# Altium PCB biv2-LRTP_1a.PcbDoc
Units mm, origin at the board's own origin, x right, y up, seen from the top; angles counter-clockwise.
Board outline 43 x 43 mm, 2 copper layers (Top Layer, Bottom Layer), stack 1.535 mm thick; 8 components, 8 nets, 38 pads, 0 vias.
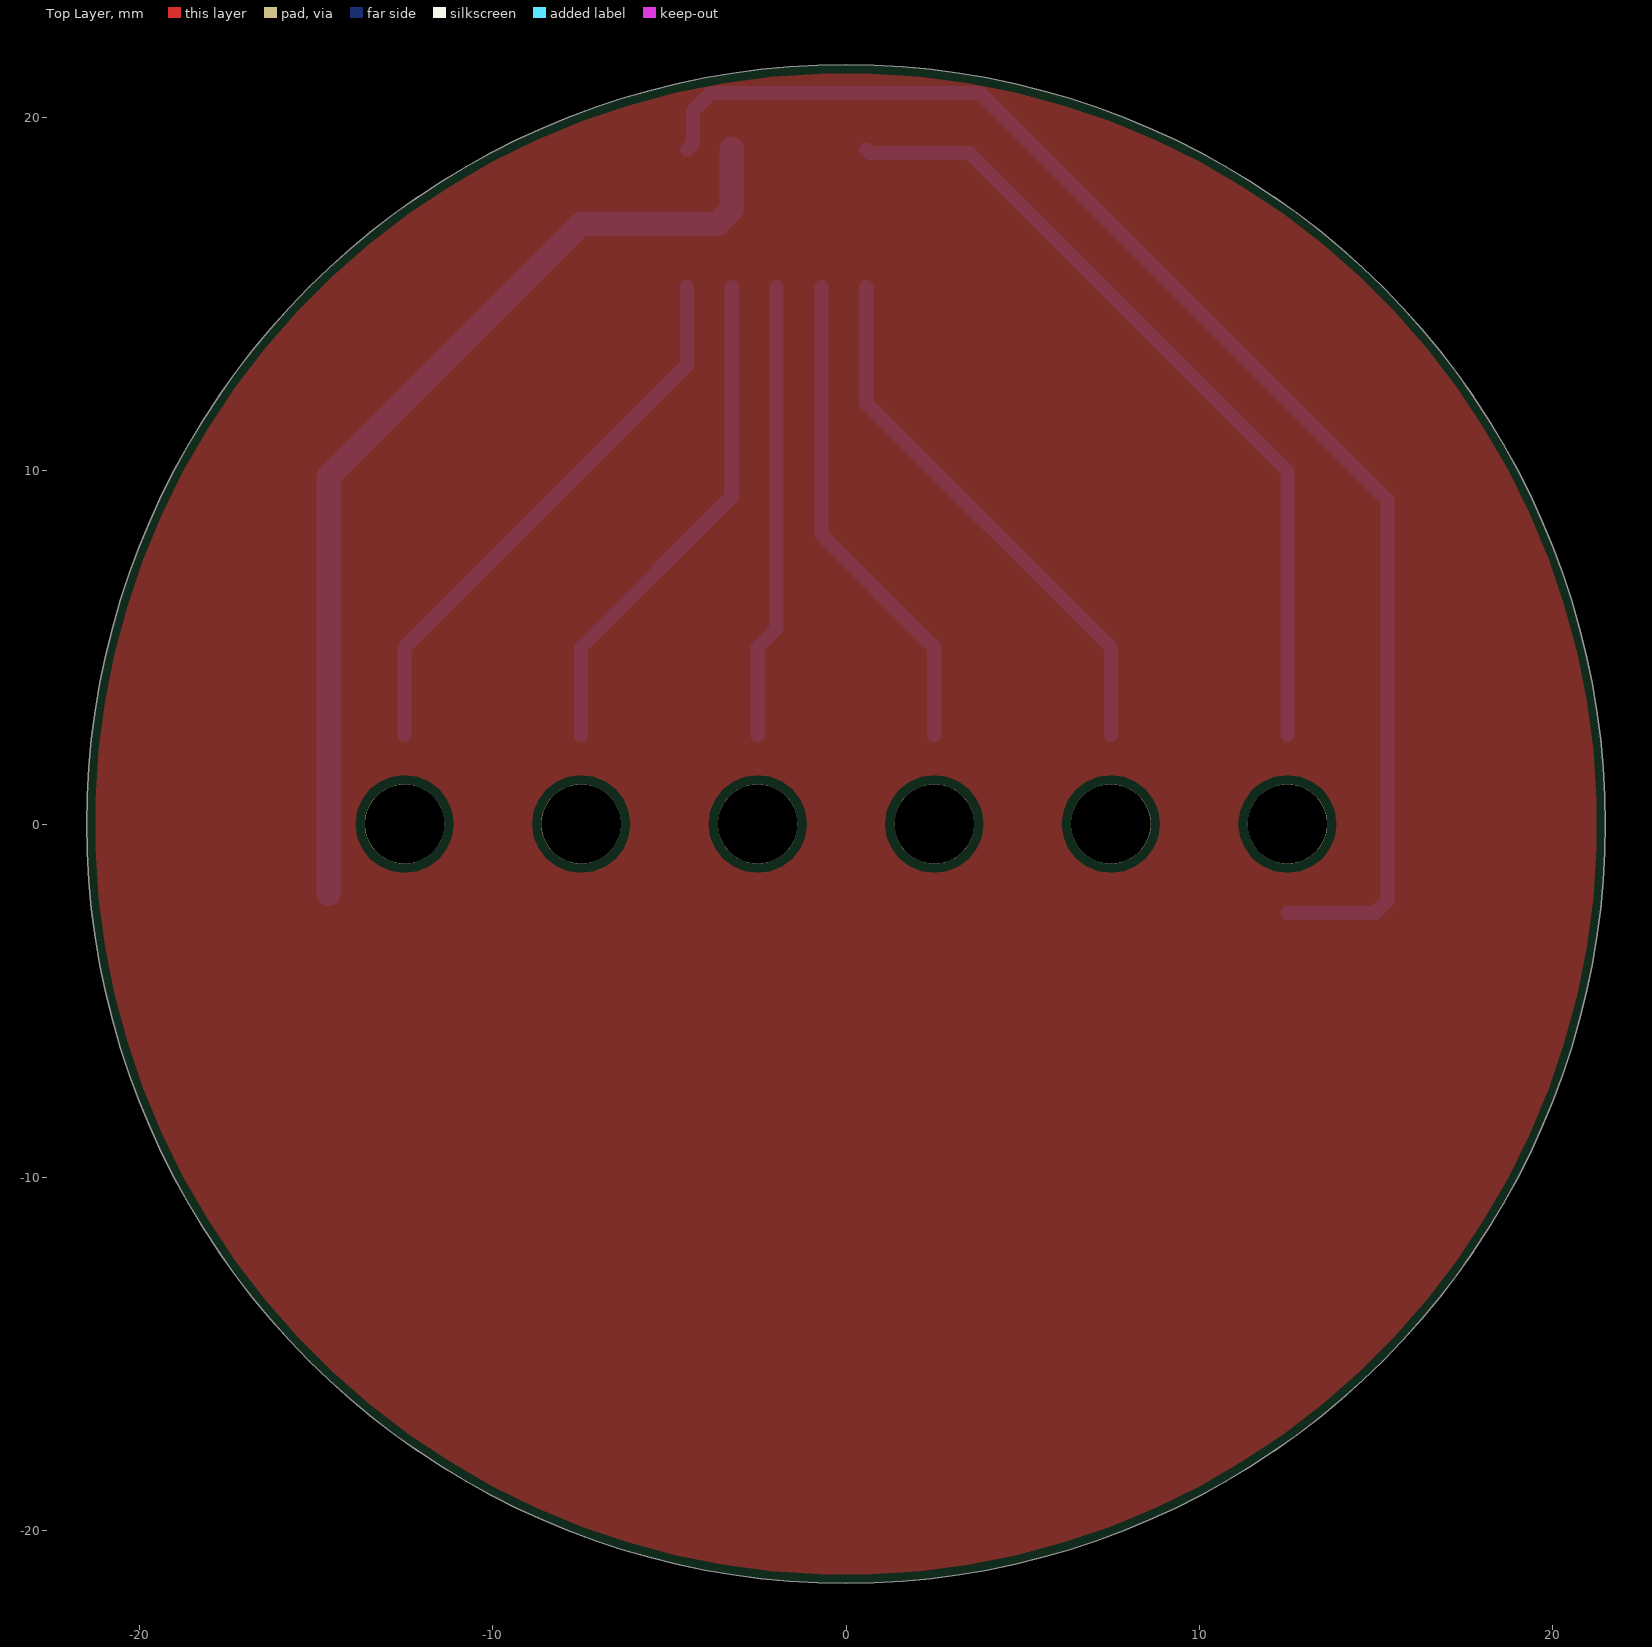
[diagram p0: Top Layer view]
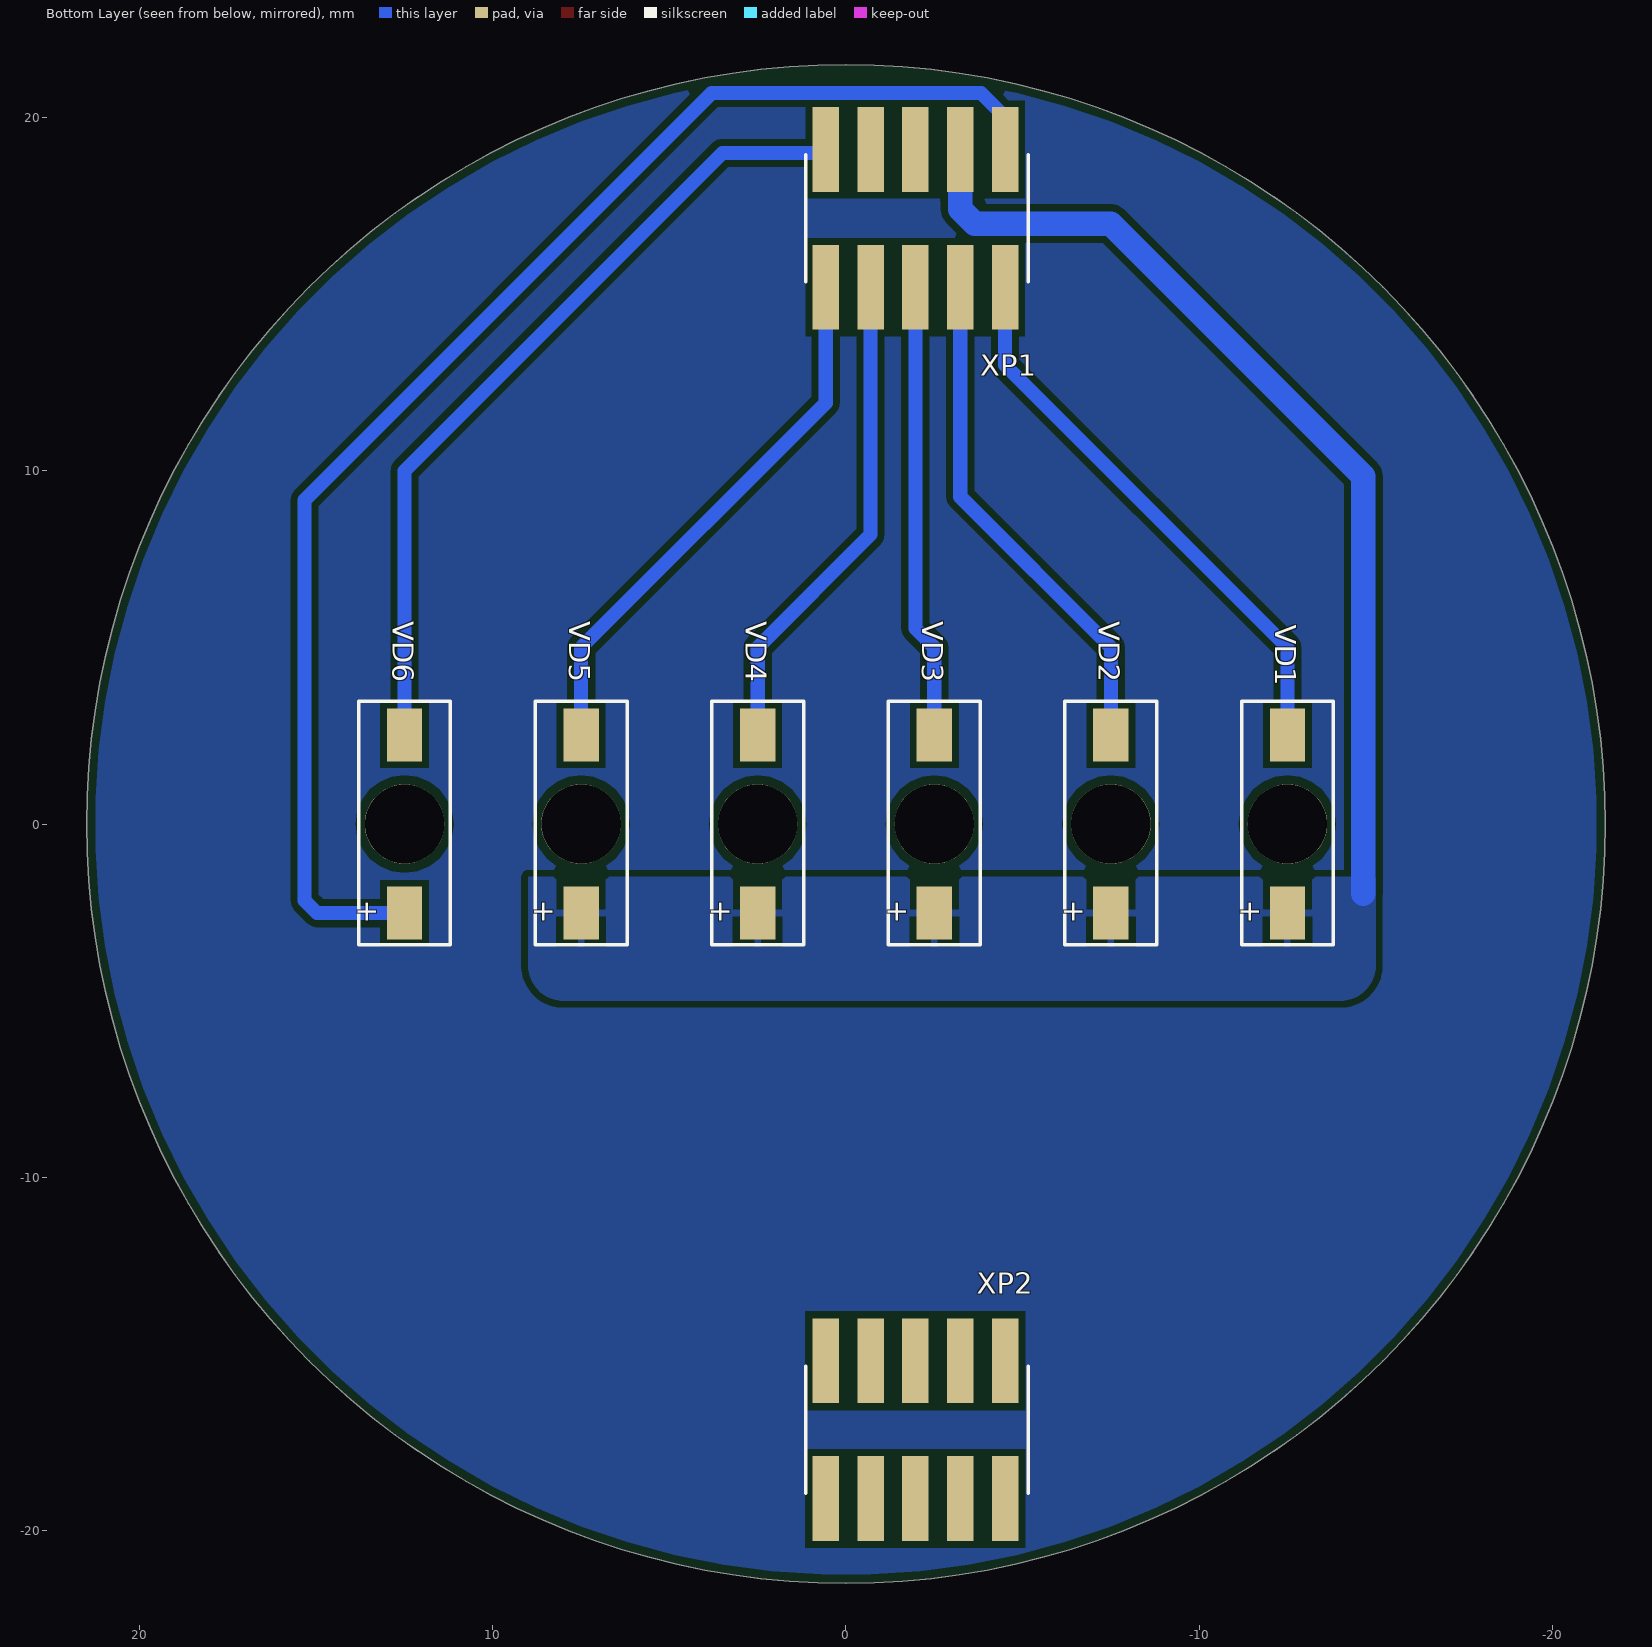
[diagram p1: Bottom Layer view, seen from below]

## Layer stack, top to bottom
Top Solder: solder mask 0.0254, SM-001, Dk 4
Top Layer: signal copper 0.018
Dielectric 1: core 1.4986, Core-043, Dk 4.3
Bottom Layer: signal copper 0.018
Bottom Solder: solder mask 0.0254, SM-001, Dk 4

## Board outline
-21.5,0 ccw(c0,0) 0,-21.5 ccw(c0,0) 21.5,0 ccw(c0,0) 0,21.5 ccw(c0,0)

## Design rules (kind name [scope] priority, off if disabled: settings)
AcuteAngle [All] p1: minimum=3.50000000000000E+0001 checktracksonly=FALSE
BoardOutlineClearance "BoardOutlineClearance 1" [All] p1: gap=0.25 ignorepadtopadclearanceinfootprint=FALSE except(0: Arc-SplitContinuation Track-SplitContinuation SMDPad-SplitContinuation THPad-SplitContinuation Via-SplitContinuation Fill-SplitContinuation Poly-SplitContinuation Region-SplitContinuation Text-SplitContinuation) // Milling
BoardOutlineClearance "BoardOutlineClearance 2" [All] p2: gap=0.4 ignorepadtopadclearanceinfootprint=FALSE except(0: Arc-SplitContinuation Track-SplitContinuation SMDPad-SplitContinuation THPad-SplitContinuation Via-SplitContinuation Fill-SplitContinuation Poly-SplitContinuation Region-SplitContinuation Text-SplitContinuation) // V-Cut
Clearance "Clearance-1 1 Oz" [All] p1: gap=0.2 ignorepadtopadclearanceinfootprint=TRUE except(0.25: Arc-Hole Track-Hole SMDPad-Hole THPad-Hole Via-Hole Fill-Hole Poly-Hole Region-Hole Text-Hole) // Standart
Clearance "Clearance-1 1/2 Oz" [All] p2: gap=0.125 ignorepadtopadclearanceinfootprint=FALSE except(0.2: Arc-Fill Arc-Poly Track-Fill Track-Poly SMDPad-SMDPad SMDPad-Fill SMDPad-Poly THPad-Fill THPad-Poly Via-Fill Via-Poly Fill-Fill Fill-Poly Poly-Poly Poly-Region Poly-Text; 0.25: Arc-Hole Track-Hole SMDPad-Hole THPad-Hole Via-Hole Fill-Hole Poly-Hole Region-Hole Text-Hole) // Standart
DiffPairsRouting "DiffPairsRouting 1 Oz" [All] p1: maxlimit=0.254 minlimit=0.2 mostfreqgap=0.254 toplayer_minwidth=0.2 toplayer_maxwidth=0.381 toplayer_prefwidth=0.381 bottomlayer_minwidth=0.2 bottomlayer_maxwidth=0.381 bottomlayer_prefwidth=0.381 maxuncoupledlength=12.7
DiffPairsRouting "DiffPairsRouting 1/2 Oz" [All] p2: maxlimit=0.254 minlimit=0.1 mostfreqgap=0.254 toplayer_minwidth=0.1 toplayer_maxwidth=0.381 toplayer_prefwidth=0.381 bottomlayer_minwidth=0.1 bottomlayer_maxwidth=0.381 bottomlayer_prefwidth=0.381 maxuncoupledlength=12.7
HoleSize "Minimum HoleSize" [IsPad] p1: absolutevalues=TRUE maxlimit=5.9 minlimit=0.6 maxpercent=80.000 minpercent=20.000
HoleSize "Minimum HoleSize VIA 1" [IsVia] p2: absolutevalues=TRUE maxlimit=5.9 minlimit=0.3 maxpercent=80.000 minpercent=20.000 // Standart
HoleToHoleClearance Hole2HoleClearance [All] p1: gap=0.25 allowstackedmicrovias=FALSE
MinimumAnnularRing "Minimum AR VIA Standart" [IsVia] p1: minimumring=0.15
MinimumAnnularRing "Minimum AR PAD Standart" [IsPAD] p2: minimumring=0.2
MinimumAnnularRing "Minimum AR VIA Advance" [IsVia] p3: minimumring=0.1
MinimumAnnularRing "Minimum AR PAD Advance" [IsPAD] p4: minimumring=0.15
MinimumSolderMaskSliver "SolderMask Bridge Standart" [All] p1: minsoldermaskwidth=0.15 // All Masks
MinimumSolderMaskSliver "SolderMask Bridge Advance" [All] p2: minsoldermaskwidth=0.1 // Mask LDI
PlaneClearance "PlaneClearance 1 Oz" [All] p1: clearance=0.2
PlaneClearance "PlaneClearance-1 1/2 Oz" [All] p2: clearance=0.2 // Standart
PlaneConnect "TermalConnect-1 1 Oz" [All] p1: planeconnectstyle=Relief reliefexpansion=0.2 reliefentries=4 reliefconductorwidth=0.2 reliefairgap=0.2 // Standart
PolygonConnect "PolygonConnect-1 1 Oz" [All] p1: thpad.connectstyle=Relief thpad.reliefconductorwidth=0.2 thpad.reliefentries=4 thpad.polygonreliefangle="90 Angle" thpad.airgapwidth=0.2 smdpad.connectstyle=Relief smdpad.reliefconductorwidth=0.2 smdpad.reliefentries=4 smdpad.polygonreliefangle="90 Angle" smdpad.airgapwidth=0.2 via.connectstyle=Direct via.reliefconductorwidth=0.254 via.reliefentries=4 via.polygonreliefangle="90 Angle" via.airgapwidth=0.254 // Standart
PolygonConnect "PolygonConnect-1 1/2 Oz" [All] p2: thpad.connectstyle=Relief thpad.reliefconductorwidth=0.15 thpad.reliefentries=4 thpad.polygonreliefangle="90 Angle" thpad.airgapwidth=0.2 smdpad.connectstyle=Relief smdpad.reliefconductorwidth=0.2 smdpad.reliefentries=4 smdpad.polygonreliefangle="90 Angle" smdpad.airgapwidth=0.2 via.connectstyle=Direct via.reliefconductorwidth=0.254 via.reliefentries=4 via.polygonreliefangle="90 Angle" via.airgapwidth=0.254 // Standart
RoutingCorners [All] p1 off: cornerstyle=45-Degree minsetback=2.54 maxsetback=2.54
RoutingVias [All] p1: holewidth=0.3 width=0.6 viastyle="Through Hole" minholewidth=0.2 minwidth=0.4 maxholewidth=5.9 maxwidth=6.4
ShortCircuit [All] p1: allowed=TRUE
SilkToSilkClearance Silk2SilkClearance [All] p1 off: silktosilkclearance=0.15
SilkToSolderMaskClearance Silk2SolderMaskClearance [IsPad] p1 off: minsilkscreentomaskgap=0.15 clearancetoexposedcopper=TRUE
SolderMaskExpansion SolderMaskExpansion-1 [All] p1: expansion=0.05 istentingtop=FALSE // Standart
SolderMaskExpansion "SolderMaskExpansion LDI" [All] p2: expansion=0.025 istentingtop=FALSE // Advance
UnRoutedNet [All] p1: checkbadconnections=TRUE
Width "Width 1 Oz" [All] p1: maxlimit=10 minlimit=0.15 preferedwidth=0.2 checkconnectedcopper=TRUE
Width "Width 1/2 Oz" [All] p2: maxlimit=10 minlimit=0.1 preferedwidth=0.125 checkconnectedcopper=TRUE
19 further rules are at their usual default settings.

## Components (designator, comment, footprint, x,y, rotation, side; value= is the part's Value field where it differs from the comment)
VD1 "KM2520SURCK09" KM2520SURCK09 -12.5,-2.525 r90 bottom
VD2 "KM2520SURCK09" KM2520SURCK09 -7.5,-2.525 r90 bottom
VD3 "KM2520SURCK09" KM2520SURCK09 -2.5,-2.525 r90 bottom
VD4 "KM2520SURCK09" KM2520SURCK09 2.5,-2.525 r90 bottom
VD5 "KM2520SURCK09" KM2520SURCK09 7.5,-2.525 r90 bottom
VD6 "KM2520SURCK09" KM2520SURCK09 12.5,-2.525 r90 bottom
XP1 "PLLD-10S" "CON: PLLD-10S" -1.965,17.15 r180 bottom locked
XP2 "PLLD-10S" "CON: PLLD-10S" -1.965,-17.15 r180 bottom locked

## Footprints (in the part's own frame and the unit in brackets; to place one, negate y for a bottom-side part, rotate by r counter-clockwise, add the part's x,y. Pads: shape width x height; smd on the part's side, far side on the other; paste and mask are expansions set on the pad)
"CON: PLLD-10S" [mm]
  rect 0.75x2.4 smd: 1(-2.54,-1.95) 2(-2.54,1.95) 3(-1.27,-1.95) 4(-1.27,1.95) 5(0,-1.95) 6(0,1.95) 7(1.27,-1.95) 8(1.27,1.95) 9(2.54,-1.95) 10(2.54,1.95)
  silkscreen extent -3.1,-1.8 3.2,1.8, body extent -3.13,-2.74 3.22,2.66, height 4.46
KM2520SURCK09 [mm] "SM LED Body 1.6x0.8mm; 2 Flat Leads"
  round 2.25 hole 2.25 unplated: 0(2.525,0)
  rect 1.5x1 smd: 1(0,0) 2(5.05,0)
  silkscreen extent -0.9,-1.3 6,1.3, body extent 1.1,-0.9 3.5,1, height 1.5

## Part data
VD1 VD2 VD3 VD4 VD5 VD6: "LED"
XP1 XP2: "Step 1.27"

## Nets (pads, with @x,y where several pads share a name; then routed paths per layer and width w, separated by ;. In a path a pad name is that pad's centre, name@x,y a point inside that pad or via, vN(x,y) a via of type N, cw(c..) or ccw(c..) an arc to the next point about the centre after c; other vN are vias at no path point)
LED1: VD6.1 XP1.10 | length 40.1
  Bottom Layer w0.4: XP1.10 -4.33,19.275 -4.33,20.194 -3.824,20.7 3.8,20.7 15.334,9.166 15.334,-2.166 14.975,-2.525 VD6.1
LED1_GND: VD6.2 XP1.2 | length 23.2
  Bottom Layer w0.4: XP1.2 0.675,19 3.5,19 12.5,10 VD6.2
LED2: VD1.2 XP1.9 | length 16
  Bottom Layer w0.4: VD1.2 -12.5,5 -4.505,12.995 XP1.9
LED3: VD2.2 XP1.7 | length 14.4
  Bottom Layer w0.4: VD2.2 -7.5,5 -3.235,9.265 XP1.7
LED4: VD3.2 XP1.5 | length 12.9
  Bottom Layer w0.4: VD3.2 -2.5,5 -1.965,5.535 XP1.5
LED5: VD4.2 XP1.3 | length 14
  Bottom Layer w0.4: XP1.3 -0.695,8.195 2.5,5 VD4.2
LED6: VD5.2 XP1.1 | length 15.5
  Bottom Layer w0.4: XP1.1 0.575,11.925 7.5,5 VD5.2
VDD: VD1.1 VD2.1 VD3.1 VD4.1 VD5.1 XP1.8 | length 28.1
  Bottom Layer w0.7: -14.65,-1.977 -14.65,9.85 -7.5,17 -3.645,17 -3.235,17.41 XP1.8
pads on no net: VD1.0 VD2.0 VD3.0 VD4.0 VD5.0 VD6.0 XP1.4 XP1.6 XP2.1 XP2.2 XP2.3 XP2.4 XP2.5 XP2.6 XP2.7 XP2.8 XP2.9 XP2.10

## Polygon pours and split planes (outlines as drawn)
no net on Bottom Layer "NONET_L02_P001" (solid, pour order 1): -21.5,0 ccw(c0,0) 0,-21.5 ccw(c0,0) 21.5,0 ccw(c0,0) 0,21.5 ccw(c0,0)
VDD on Bottom Layer "VDD_L02_P000" (solid, pour order 0): 9,-4 cw(c8,-4) 8,-5 -14,-5 cw(c-14,-4) -15,-4 -15,-1.5 9,-1.5
no net on Top Layer "NONET_L01_P002" (solid, pour order 2): -21.5,0 ccw(c0,0) 0,-21.5 ccw(c0,0) 21.5,0 ccw(c0,0) 0,21.5 ccw(c0,0)

## Silkscreen, mask and mechanical layers (free items; w line width, h text height)
Bottom Solder:
  lines w0.2: -13,-4.5 -12,-4.5 ; -12.5,-5 -12.5,-4 ; -8,-4.5 -7,-4.5 ; -7.5,-5 -7.5,-4 ; -3,-4.5 -2,-4.5 ; -2.5,-5 -2.5,-4 ; 2,-4.5 3,-4.5 ; 2.5,-5 2.5,-4 ; 7,-4.5 8,-4.5 ; 7.5,-5 7.5,-4 ; 12,-4.5 13,-4.5 ; 12.5,-5 12.5,-4
Board:
  circle w0.1: c0,0 r21.5

## Text inside footprints (layer, text, board x,y; h text height)
VD1: Bottom Overlay "+" at -11.9,-2.825 h1 r270
VD2: Bottom Overlay "+" at -6.9,-2.825 h1 r270
VD3: Bottom Overlay "+" at -1.9,-2.825 h1 r270
VD4: Bottom Overlay "+" at 3.1,-2.825 h1 r270
VD5: Bottom Overlay "+" at 8.1,-2.825 h1 r270
VD6: Bottom Overlay "+" at 13.1,-2.825 h1 r270